# Altium PCB parsa_nami.PcbDoc (part 3 of 3)
Units mm, origin at the board's own origin, x right, y up, seen from the top; angles counter-clockwise.
Board outline 98.55 x 75.06 mm, 2 copper layers (Top Layer, Bottom Layer); 28 components, 23 nets, 118 pads, 19 vias.
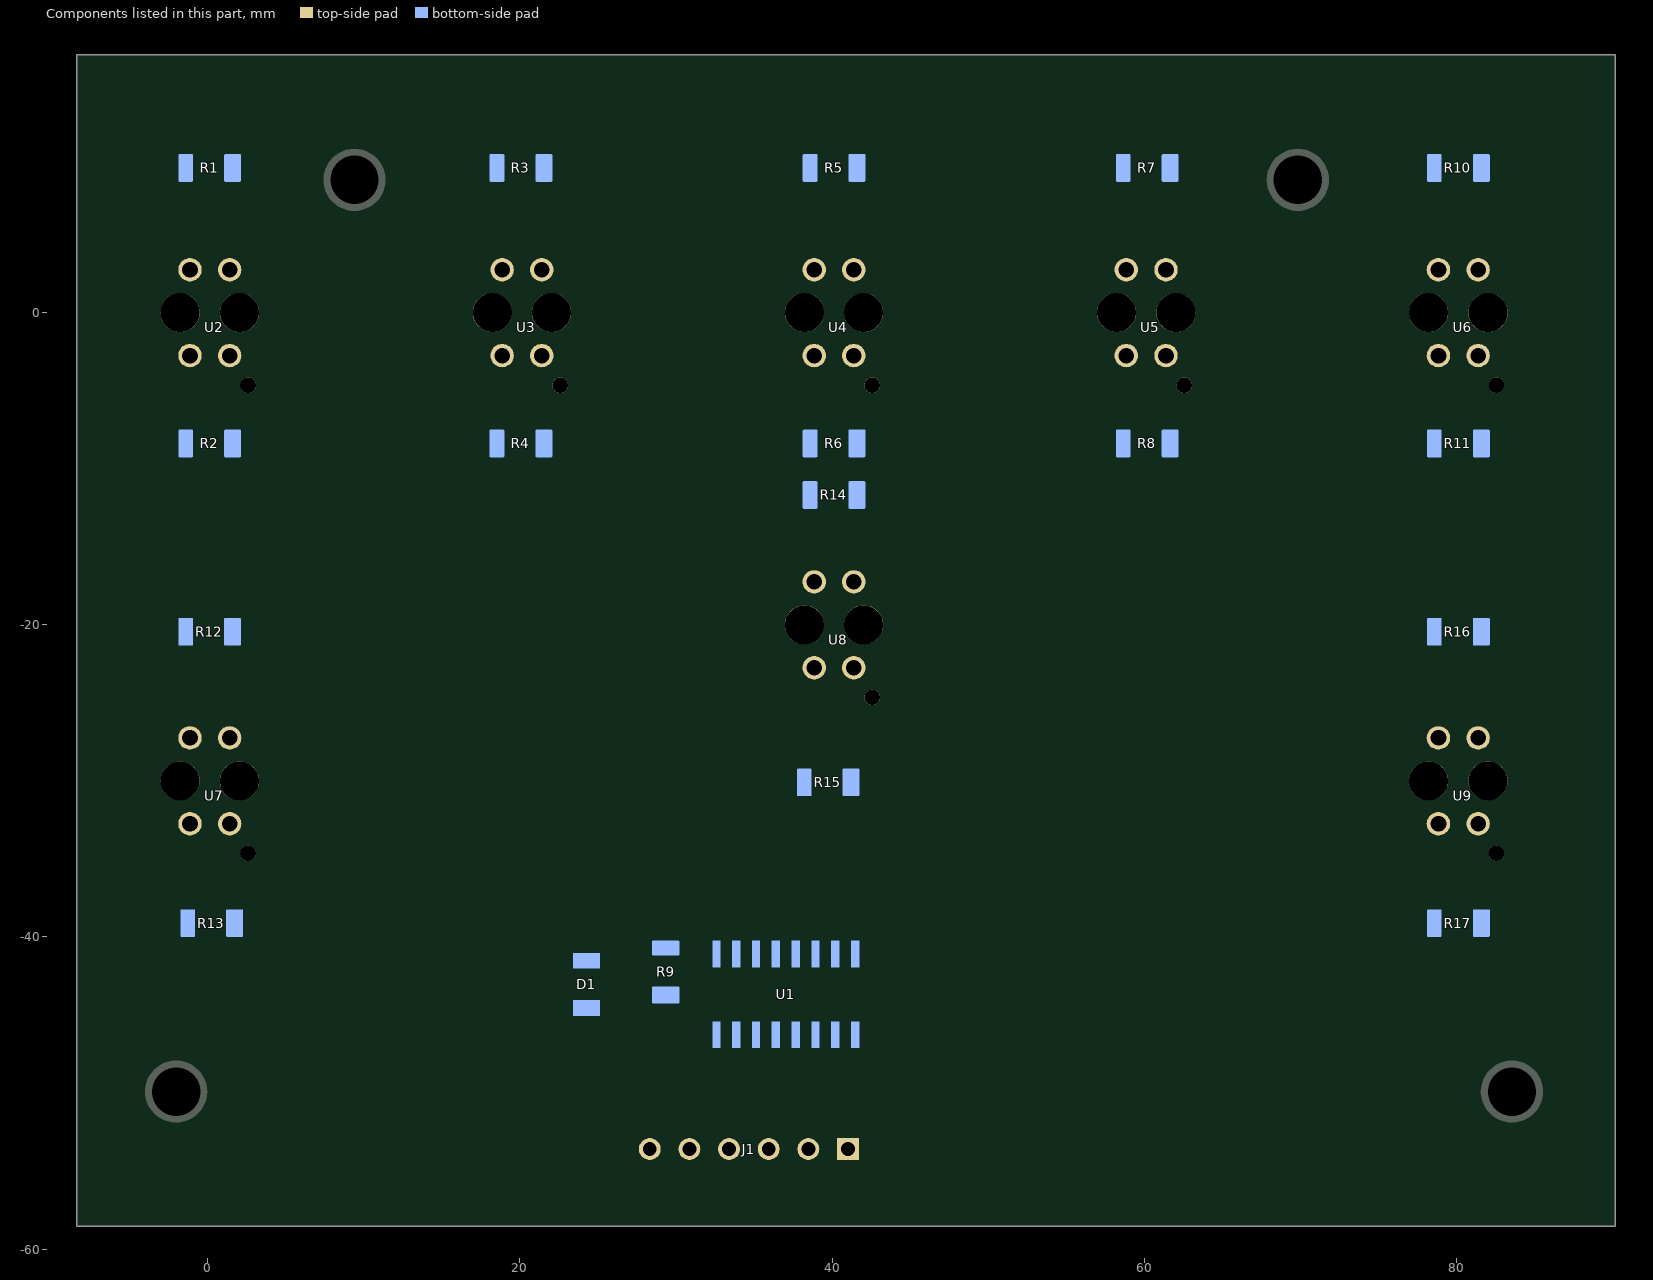
[diagram p3: the components of this part, seen from the top]

## Via types
v1: diameter 1.27, hole 0.711, Top Layer to Bottom Layer, 19 vias

## Nets (pads, with @x,y where several pads share a name; then routed paths per layer and width w, separated by ;. In a path a pad name is that pad's centre, name@x,y a point inside that pad or via, vN(x,y) a via of type N, cw(c..) or ccw(c..) an arc to the next point about the centre after c; other vN are vias at no path point) (continued)
copper on no net: (continued)
  Bottom Layer w0.013: 76.657,-43.282 77.483,-43.282 ; 76.657,-43.269 77.483,-43.269 ; 76.657,-42.761 77.368,-42.761 ; 76.657,-42.748 77.368,-42.748 ; 76.657,-42.735 77.356,-42.735 ; 76.657,-42.723 77.356,-42.723 ; 76.657,-42.71 77.356,-42.71 ; 76.67,-43.256 77.47,-43.256 ; 76.67,-43.243 77.47,-43.243 ; 76.67,-43.231 77.47,-43.231 ; 76.67,-43.218 77.47,-43.218 ; 76.67,-43.205 77.47,-43.205 ; 76.67,-43.193 77.457,-43.193 ; 76.67,-43.18 77.457,-43.18 ; 76.67,-43.167 77.457,-43.167 ; 76.67,-43.155 77.445,-43.155 ; 76.67,-43.142 77.445,-43.142 ; 76.67,-43.129 77.445,-43.129 ; 76.67,-43.116 77.445,-43.116 ; 76.67,-43.104 77.432,-43.104 ; 76.67,-43.015 77.406,-43.015 ; 76.67,-43.002 77.406,-43.002 ; 76.67,-42.989 77.406,-42.989 ; 76.67,-42.977 77.406,-42.977 ; 76.67,-42.964 77.406,-42.964 ; 76.67,-42.951 77.394,-42.951 ; 76.67,-42.939 77.394,-42.939 ; 76.67,-42.926 77.394,-42.926 ; 76.67,-42.812 77.381,-42.812 ; 76.67,-42.799 77.368,-42.799 ; 76.67,-42.786 77.368,-42.786 ; 76.67,-42.774 77.368,-42.774 ; 76.683,-47.079 77.749,-47.079 ; 76.683,-43.091 77.432,-43.091 ; 76.683,-43.078 77.419,-43.078 ; 76.683,-43.066 77.419,-43.066 ; 76.683,-43.053 77.419,-43.053 ; 76.683,-43.04 77.419,-43.04 ; 76.683,-43.028 77.419,-43.028 ; 76.683,-42.913 77.394,-42.913 ; 76.683,-42.901 77.394,-42.901 ; 76.683,-42.888 77.394,-42.888 ; 76.683,-42.875 77.381,-42.875 ; 76.683,-42.862 77.381,-42.862 ; 76.683,-42.85 77.381,-42.85 ; 76.683,-42.837 77.381,-42.837 ; 76.683,-42.824 77.381,-42.824 ; 76.683,-41.834 76.695,-41.834 ; 76.721,-47.066 77.775,-47.066 ; 76.772,-47.053 77.787,-47.053 ; 76.81,-47.041 77.8,-47.041 ; 76.835,-47.028 77.813,-47.028 ; 76.848,-43.84 77.686,-43.84 ; 76.86,-43.853 77.686,-43.853 ; 76.873,-47.015 77.838,-47.015 ; 76.873,-43.866 77.699,-43.866 ; 76.886,-43.878 77.699,-43.878 ; 76.898,-43.891 77.711,-43.891 ; 76.911,-47.003 77.851,-47.003 ; 76.911,-43.904 77.711,-43.904 ; 76.924,-43.929 77.724,-43.929 ; 76.924,-43.917 77.724,-43.917 ; 76.937,-46.99 77.864,-46.99 ; 76.937,-43.955 77.737,-43.955 ; 76.937,-43.942 77.724,-43.942 ; 76.949,-43.98 77.749,-43.98 ; 76.949,-43.967 77.737,-43.967 ; 76.962,-46.977 77.876,-46.977 ; 76.962,-44.005 77.762,-44.005 ; 76.962,-43.993 77.749,-43.993 ; 76.975,-44.031 77.775,-44.031 ; 76.975,-44.018 77.762,-44.018 ; 76.987,-44.056 77.775,-44.056 ; 76.987,-44.044 77.775,-44.044 ; 77,-46.965 77.902,-46.965 ; 77,-44.082 77.787,-44.082 ; 77,-44.069 77.787,-44.069 ; 77.013,-44.12 77.813,-44.12 ; 77.013,-44.107 77.8,-44.107 ; 77.013,-44.094 77.8,-44.094 ; 77.025,-46.952 77.915,-46.952 ; 77.025,-44.158 77.826,-44.158 ; 77.025,-44.145 77.813,-44.145 ; 77.025,-44.133 77.813,-44.133 ; 77.038,-44.183 77.838,-44.183 ; 77.038,-44.171 77.826,-44.171 ; 77.051,-46.939 77.927,-46.939 ; 77.051,-44.209 77.851,-44.209 ; 77.051,-44.196 77.838,-44.196 ; 77.064,-44.259 77.864,-44.259 ; 77.064,-44.247 77.864,-44.247 ; 77.064,-44.234 77.864,-44.234 ; 77.064,-44.221 77.851,-44.221 ; 77.076,-46.926 77.94,-46.926 ; 77.076,-44.298 77.889,-44.298 ; 77.076,-44.285 77.876,-44.285 ; 77.076,-44.272 77.876,-44.272 ; 77.089,-44.348 77.915,-44.348 ; 77.089,-44.336 77.902,-44.336 ; 77.089,-44.323 77.902,-44.323 ; 77.089,-44.31 77.889,-44.31 ; 77.102,-46.914 77.953,-46.914 ; 77.102,-44.386 77.927,-44.386 ; 77.102,-44.374 77.927,-44.374 ; 77.102,-44.361 77.915,-44.361 ; 77.114,-44.425 77.94,-44.425 ; 77.114,-44.412 77.94,-44.412 ; 77.114,-44.399 77.927,-44.399 ; 77.127,-46.901 77.965,-46.901 ; 77.127,-44.463 77.965,-44.463 ; 77.127,-44.45 77.953,-44.45 ; 77.127,-44.437 77.953,-44.437 ; 77.14,-44.501 77.978,-44.501 ; 77.14,-44.488 77.978,-44.488 ; 77.14,-44.475 77.965,-44.475 ; 77.153,-46.888 77.978,-46.888 ; 77.153,-44.552 78.003,-44.552 ; 77.153,-44.539 77.991,-44.539 ; 77.153,-44.526 77.991,-44.526 ; 77.153,-44.514 77.978,-44.514 ; 77.165,-44.602 78.029,-44.602 ; 77.165,-44.59 78.016,-44.59 ; 77.165,-44.577 78.016,-44.577 ; 77.165,-44.564 78.003,-44.564 ; 77.178,-46.876 78.003,-46.876 ; 77.178,-44.64 78.041,-44.64 ; 77.178,-44.628 78.041,-44.628 ; 77.178,-44.615 78.029,-44.615 ; 77.191,-44.691 78.067,-44.691 ; 77.191,-44.679 78.054,-44.679 ; 77.191,-44.666 78.054,-44.666 ; 77.191,-44.653 78.054,-44.653 ; 77.203,-46.863 78.016,-46.863 ; 77.203,-44.729 78.08,-44.729 ; 77.203,-44.717 78.08,-44.717 ; 77.203,-44.704 78.08,-44.704 ; 77.216,-44.767 78.092,-44.767 ; 77.216,-44.755 78.092,-44.755 ; 77.216,-44.742 78.092,-44.742 ; 77.229,-46.85 78.029,-46.85 ; 77.229,-44.793 78.105,-44.793 ; 77.229,-44.78 78.105,-44.78 ; 77.241,-46.838 78.041,-46.838 ; 77.241,-44.856 78.13,-44.856 ; 77.241,-44.844 78.13,-44.844 ; 77.241,-44.831 78.118,-44.831 ; 77.241,-44.818 78.118,-44.818 ; 77.241,-44.806 78.118,-44.806 ; 77.254,-44.895 78.156,-44.895 ; 77.254,-44.882 78.143,-44.882 ; 77.254,-44.869 78.143,-44.869 ; 77.267,-46.825 78.054,-46.825 ; 77.267,-44.92 78.168,-44.92 ; 77.267,-44.907 78.156,-44.907 ; 77.279,-44.945 78.181,-44.945 ; 77.279,-44.933 78.168,-44.933 ; 77.292,-46.812 78.067,-46.812 ; 77.292,-44.983 78.194,-44.983 ; 77.292,-44.971 78.181,-44.971 ; 77.292,-44.958 78.181,-44.958 ; 77.305,-46.799 78.08,-46.799 ; 77.305,-45.034 78.219,-45.034 ; 77.305,-45.021 78.219,-45.021 ; 77.305,-45.009 78.207,-45.009 ; 77.305,-44.996 78.207,-44.996 ; 77.318,-45.072 78.232,-45.072 ; 77.318,-45.06 78.232,-45.06 ; 77.318,-45.047 78.219,-45.047 ; 77.33,-46.787 78.092,-46.787 ; 77.33,-45.11 78.257,-45.11 ; 77.33,-45.098 78.257,-45.098 ; 77.33,-45.085 78.245,-45.085 ; 77.343,-46.774 78.105,-46.774 ; 77.343,-45.136 78.27,-45.136 ; 77.343,-45.123 78.27,-45.123 ; 77.356,-45.174 78.295,-45.174 ; 77.356,-45.161 78.283,-45.161 ; 77.356,-45.148 78.283,-45.148 ; 77.368,-46.761 78.118,-46.761 ; 77.368,-45.199 78.308,-45.199 ; 77.368,-45.187 78.308,-45.187 ; 77.381,-46.749 78.13,-46.749 ; 77.381,-45.237 78.334,-45.237 ; 77.381,-45.225 78.321,-45.225 ; 77.381,-45.212 78.321,-45.212 ; 77.394,-45.25 78.334,-45.25 ; 77.406,-46.736 78.143,-46.736 ; 77.406,-45.276 78.359,-45.276 ; 77.406,-45.263 78.346,-45.263 ; 77.419,-46.723 78.156,-46.723 ; 77.419,-45.301 78.372,-45.301 ; 77.419,-45.288 78.359,-45.288 ; 77.432,-45.339 78.397,-45.339 ; 77.432,-45.326 78.384,-45.326 ; 77.432,-45.314 78.384,-45.314 ; 77.445,-46.711 78.168,-46.711 ; 77.445,-45.364 78.41,-45.364 ; 77.445,-45.352 78.397,-45.352 ; 77.457,-46.698 78.181,-46.698 ; 77.457,-45.39 78.422,-45.39 ; 77.457,-45.377 78.422,-45.377 ; 77.457,-42.139 77.483,-42.139 ; 77.47,-46.685 78.181,-46.685 ; 77.47,-45.402 78.435,-45.402 ; 77.47,-42.177 77.546,-42.177 ; 77.47,-42.164 77.521,-42.164 ; 77.47,-42.151 77.495,-42.151 ; 77.483,-45.428 78.448,-45.428 ; 77.483,-45.415 78.435,-45.415 ; 77.483,-42.215 77.61,-42.215 ; 77.483,-42.202 77.584,-42.202 ; 77.483,-42.189 77.559,-42.189 ; 77.495,-46.672 78.194,-46.672 ; 77.495,-45.453 78.473,-45.453 ; 77.495,-45.441 78.461,-45.441 ; 77.495,-42.266 77.686,-42.266 ; 77.495,-42.253 77.66,-42.253 ; 77.495,-42.24 77.648,-42.24 ; 77.495,-42.227 77.622,-42.227 ; 77.508,-46.66 78.207,-46.66 ; 77.508,-45.479 78.486,-45.479 ; 77.508,-45.466 78.473,-45.466 ; 77.508,-42.329 77.775,-42.329 ; 77.508,-42.316 77.749,-42.316 ; 77.508,-42.304 77.737,-42.304 ; 77.508,-42.291 77.711,-42.291 ; 77.508,-42.278 77.699,-42.278 ; 77.521,-46.647 78.219,-46.647 ; 77.521,-45.504 78.499,-45.504 ; 77.521,-45.491 78.499,-45.491 ; 77.521,-42.405 77.864,-42.405 ; 77.521,-42.393 77.851,-42.393 ; 77.521,-42.38 77.838,-42.38 ; 77.521,-42.367 77.813,-42.367 ; 77.521,-42.355 77.8,-42.355 ; 77.521,-42.342 77.787,-42.342 ; 77.534,-45.529 78.524,-45.529 ; 77.534,-45.517 78.511,-45.517 ; 77.534,-42.456 77.927,-42.456 ; 77.534,-42.443 77.915,-42.443 ; 77.534,-42.431 77.902,-42.431 ; 77.534,-42.418 77.876,-42.418 ; 77.546,-46.634 78.232,-46.634 ; 77.546,-45.555 78.537,-45.555 ; 77.546,-45.542 78.537,-45.542 ; 77.546,-42.52 77.851,-42.52 ; 77.546,-42.507 77.851,-42.507 ; 77.546,-42.494 77.851,-42.494 ; 77.546,-42.481 77.864,-42.481 ; 77.546,-42.469 77.94,-42.469 ; 77.559,-46.622 78.232,-46.622 ; 77.559,-45.568 78.549,-45.568 ; 77.559,-42.583 77.775,-42.583 ; 77.559,-42.57 77.787,-42.57 ; 77.559,-42.558 77.8,-42.558 ; 77.559,-42.545 77.813,-42.545 ; 77.559,-42.532 78.016,-42.532 ; 77.572,-46.609 78.219,-46.609 ; 77.572,-45.593 78.562,-45.593 ; 77.572,-45.58 78.562,-45.58 ; 77.572,-42.647 77.724,-42.647 ; 77.572,-42.634 77.737,-42.634 ; 77.572,-42.621 77.749,-42.621 ; 77.572,-42.608 77.749,-42.608 ; 77.572,-42.596 77.762,-42.596 ; 77.584,-46.596 78.207,-46.596 ; 77.584,-45.618 78.588,-45.618 ; 77.584,-45.606 78.575,-45.606 ; 77.584,-42.71 77.699,-42.71 ; 77.584,-42.697 77.686,-42.697 ; 77.584,-42.685 77.699,-42.685 ; 77.584,-42.672 77.699,-42.672 ; 77.584,-42.659 77.711,-42.659 ; 77.597,-46.584 78.194,-46.584 ; 77.597,-45.644 78.613,-45.644 ; 77.597,-45.631 78.6,-45.631 ; 77.597,-42.786 77.915,-42.786 ; 77.597,-42.774 77.787,-42.774 ; 77.597,-42.761 77.775,-42.761 ; 77.597,-42.748 77.775,-42.748 ; 77.597,-42.735 77.775,-42.735 ; 77.597,-42.723 77.787,-42.723 ; 77.61,-45.657 78.613,-45.657 ; 77.61,-42.812 77.889,-42.812 ; 77.61,-42.799 77.902,-42.799 ; 77.622,-46.571 78.181,-46.571 ; 77.622,-45.669 78.626,-45.669 ; 77.622,-42.824 77.876,-42.824 ; 77.635,-46.558 78.156,-46.558 ; 77.635,-45.695 78.638,-45.695 ; 77.635,-45.682 78.638,-45.682 ; 77.635,-42.837 77.864,-42.837 ; 77.648,-46.545 78.143,-46.545 ; 77.648,-45.707 78.651,-45.707 ; 77.648,-42.85 77.864,-42.85 ; 77.66,-46.533 78.13,-46.533 ; 77.66,-45.72 78.664,-45.72 ; 77.66,-42.862 77.876,-42.862 ; 77.673,-46.52 78.13,-46.52 ; 77.673,-45.745 78.676,-45.745 ; 77.673,-45.733 78.676,-45.733 ; 77.673,-42.875 78.003,-42.875 ; 77.686,-46.507 78.118,-46.507 ; 77.686,-45.758 78.689,-45.758 ; 77.686,-42.888 77.991,-42.888 ; 77.699,-46.495 78.105,-46.495 ; 77.699,-45.783 78.715,-45.783 ; 77.699,-45.771 78.702,-45.771 ; 77.699,-42.901 77.978,-42.901 ; 77.711,-46.482 78.105,-46.482 ; 77.711,-45.796 78.715,-45.796 ; 77.711,-42.913 77.965,-42.913 ; 77.724,-46.469 78.092,-46.469 ; 77.724,-45.822 78.74,-45.822 ; 77.724,-45.809 78.727,-45.809 ; 77.724,-42.926 77.953,-42.926 ; 77.724,-42.71 77.8,-42.71 ; 77.724,-42.697 77.826,-42.697 ; 77.737,-46.457 78.08,-46.457 ; 77.737,-45.834 78.753,-45.834 ; 77.737,-42.939 77.953,-42.939 ; 77.749,-46.444 78.067,-46.444 ; 77.749,-45.847 78.753,-45.847 ; 77.749,-42.951 77.953,-42.951 ; 77.749,-42.685 77.826,-42.685 ; 77.749,-42.672 77.851,-42.672 ; 77.762,-46.431 78.054,-46.431 ; 77.762,-45.872 78.778,-45.872 ; 77.762,-45.86 78.765,-45.86 ; 77.762,-42.964 78.054,-42.964 ; 77.762,-42.659 77.864,-42.659 ; 77.775,-46.419 78.041,-46.419 ; 77.775,-45.885 78.791,-45.885 ; 77.775,-42.977 78.041,-42.977 ; 77.775,-42.647 77.876,-42.647 ; 77.787,-46.406 78.029,-46.406 ; 77.787,-45.898 78.803,-45.898 ; 77.787,-42.989 78.029,-42.989 ; 77.787,-42.634 77.889,-42.634 ; 77.8,-46.393 78.029,-46.393 ; 77.8,-45.923 78.816,-45.923 ; 77.8,-45.91 78.803,-45.91 ; 77.8,-43.002 78.003,-43.002 ; 77.8,-42.774 77.927,-42.774 ; 77.8,-42.621 78.105,-42.621 ; 77.813,-46.38 78.016,-46.38 ; 77.813,-45.936 78.829,-45.936 ; 77.813,-43.015 78.003,-43.015 ; 77.813,-42.761 77.94,-42.761 ; 77.813,-42.608 78.092,-42.608 ; 77.813,-42.596 78.08,-42.596 ; 77.826,-46.368 78.003,-46.368 ; 77.826,-45.961 78.842,-45.961 ; 77.826,-45.949 78.829,-45.949 ; 77.826,-43.028 78.003,-43.028 ; 77.826,-42.748 77.953,-42.748 ; 77.826,-42.583 78.067,-42.583 ; 77.838,-46.355 78.003,-46.355 ; 77.838,-45.974 78.854,-45.974 ; 77.838,-43.04 78.029,-43.04 ; 77.838,-42.735 77.965,-42.735 ; 77.838,-42.57 78.054,-42.57 ; 77.838,-42.558 78.041,-42.558 ; 77.838,-42.545 78.029,-42.545 ; 77.851,-46.342 77.991,-46.342 ; 77.851,-45.987 78.867,-45.987 ; 77.851,-43.053 78.029,-43.053 ; 77.851,-42.723 77.965,-42.723 ; 77.864,-46.33 77.978,-46.33 ; 77.864,-45.999 78.867,-45.999 ; 77.864,-43.066 78.041,-43.066 ; 77.864,-42.71 77.965,-42.71 ; 77.876,-46.317 77.965,-46.317 ; 77.876,-46.304 77.953,-46.304 ; 77.876,-46.025 78.892,-46.025 ; 77.876,-46.012 78.88,-46.012 ; 77.876,-43.091 78.041,-43.091 ; 77.876,-43.078 78.041,-43.078 ; 77.876,-42.697 77.965,-42.697 ; 77.876,-42.481 77.953,-42.481 ; 77.889,-46.291 77.94,-46.291 ; 77.889,-46.038 78.905,-46.038 ; 77.889,-43.104 78.054,-43.104 ; 77.889,-42.862 78.016,-42.862 ; 77.889,-42.685 77.953,-42.685 ; 77.889,-42.52 78.003,-42.52 ; 77.889,-42.507 77.978,-42.507 ; 77.889,-42.494 77.965,-42.494 ; 77.902,-46.279 77.927,-46.279 ; 77.902,-46.05 78.918,-46.05 ; 77.902,-43.116 78.067,-43.116 ; 77.902,-42.85 78.041,-42.85 ; 77.902,-42.672 77.94,-42.672 ; 77.915,-46.063 78.93,-46.063 ; 77.915,-43.129 78.092,-43.129 ; 77.915,-42.837 78.041,-42.837 ; 77.927,-46.076 78.943,-46.076 ; 77.927,-43.142 78.194,-43.142 ; 77.927,-42.824 78.054,-42.824 ; 77.94,-46.088 78.956,-46.088 ; 77.94,-43.167 78.156,-43.167 ; 77.94,-43.155 78.181,-43.155 ; 77.94,-42.812 78.054,-42.812 ; 77.953,-46.101 78.969,-46.101 ; 77.953,-43.18 78.13,-43.18 ; 77.953,-42.799 78.054,-42.799 ; 77.953,-42.634 78.118,-42.634 ; 77.965,-43.193 78.13,-43.193 ; 77.965,-42.786 78.041,-42.786 ; 77.965,-42.647 78.13,-42.647 ; 77.978,-46.114 78.981,-46.114 ; 77.978,-43.218 78.143,-43.218 ; 77.978,-43.205 78.143,-43.205 ; 77.978,-42.774 78.029,-42.774 ; 77.978,-42.672 78.156,-42.672 ; 77.978,-42.659 78.143,-42.659 ; 77.991,-46.126 78.994,-46.126 ; 77.991,-43.231 78.372,-43.231 ; 77.991,-42.951 78.08,-42.951 ; 77.991,-42.71 78.181,-42.71 ; 77.991,-42.697 78.181,-42.697 ; 77.991,-42.685 78.168,-42.685 ; 78.003,-46.152 79.019,-46.152 ; 78.003,-46.139 79.007,-46.139 ; 78.003,-43.243 78.384,-43.243 ; 78.003,-42.939 78.092,-42.939 ; 78.003,-42.761 78.016,-42.761 ; 78.016,-46.164 79.032,-46.164 ; 78.016,-43.269 78.346,-43.269 ; 78.016,-43.256 78.359,-43.256 ; 78.016,-42.926 78.105,-42.926 ; 78.029,-46.177 79.045,-46.177 ; 78.029,-43.282 78.321,-43.282 ; 78.029,-42.913 78.13,-42.913 ; 78.029,-42.723 78.194,-42.723 ; 78.041,-46.19 79.057,-46.19 ; 78.041,-43.307 78.27,-43.307 ; 78.041,-43.294 78.295,-43.294 ; 78.041,-42.901 78.346,-42.901 ; 78.054,-46.203 79.07,-46.203 ; 78.054,-43.32 78.257,-43.32 ; 78.054,-42.888 78.334,-42.888 ; 78.054,-42.735 78.207,-42.735 ; 78.067,-46.215 79.096,-46.215 ; 78.067,-43.345 78.232,-43.345 ; 78.067,-43.332 78.245,-43.332 ; 78.067,-43.04 78.118,-43.04 ; 78.067,-43.028 78.118,-43.028 ; 78.067,-42.875 78.321,-42.875 ; 78.067,-42.761 78.232,-42.761 ; 78.067,-42.748 78.219,-42.748 ; 78.08,-46.228 79.108,-46.228 ; 78.08,-43.358 78.232,-43.358 ; 78.08,-43.066 78.13,-43.066 ; 78.08,-43.053 78.13,-43.053 ; 78.08,-43.015 78.105,-43.015 ; 78.08,-43.002 78.092,-43.002 ; 78.08,-42.862 78.321,-42.862 ; 78.08,-42.786 78.257,-42.786 ; 78.08,-42.774 78.245,-42.774 ; 78.092,-46.241 79.121,-46.241 ; 78.092,-43.383 78.651,-43.383 ; 78.092,-43.37 78.638,-43.37 ; 78.092,-42.85 78.308,-42.85 ; 78.105,-46.266 79.159,-46.266 ; 78.105,-46.253 79.134,-46.253 ; 78.105,-43.396 78.651,-43.396 ; 78.105,-43.129 78.219,-43.129 ; 78.105,-43.078 78.118,-43.078 ; 78.105,-42.837 78.295,-42.837 ; 78.105,-42.799 78.27,-42.799 ; 78.118,-46.279 79.184,-46.279 ; 78.118,-43.421 78.664,-43.421 ; 78.118,-43.409 78.664,-43.409 ; 78.118,-42.964 78.181,-42.964 ; 78.118,-42.824 78.283,-42.824 ; 78.118,-42.812 78.27,-42.812 ; 78.13,-46.291 79.197,-46.291 ; 78.13,-43.447 78.676,-43.447 ; 78.13,-43.434 78.676,-43.434 ; 78.13,-42.977 78.194,-42.977 ; 78.143,-46.304 79.235,-46.304 ; 78.143,-43.459 78.448,-43.459 ; 78.143,-43.116 78.245,-43.116 ; 78.143,-43.002 78.207,-43.002 ; 78.143,-42.989 78.194,-42.989 ; 78.143,-42.951 78.168,-42.951 ; 78.156,-46.317 79.273,-46.317 ; 78.156,-43.485 78.384,-43.485 ; 78.156,-43.472 78.41,-43.472 ; 78.156,-43.104 78.27,-43.104 ; 78.156,-43.028 78.435,-43.028 ; 78.156,-43.015 78.207,-43.015 ; 78.168,-46.33 79.311,-46.33 ; 78.168,-43.51 78.334,-43.51 ; 78.168,-43.497 78.359,-43.497 ; 78.168,-43.091 78.283,-43.091 ; 78.168,-43.078 78.295,-43.078 ; 78.168,-43.066 78.321,-43.066 ; 78.168,-43.053 78.346,-43.053 ; 78.168,-43.04 78.448,-43.04 ; 78.181,-46.342 79.35,-46.342 ; 78.181,-43.536 78.321,-43.536 ; 78.181,-43.523 78.321,-43.523 ; 78.181,-42.913 78.359,-42.913 ; 78.194,-46.355 79.375,-46.355 ; 78.194,-43.561 78.346,-43.561 ; 78.194,-43.548 78.346,-43.548 ; 78.194,-42.926 78.372,-42.926 ; 78.207,-46.368 79.413,-46.368 ; 78.207,-43.586 78.346,-43.586 ; 78.207,-43.574 78.346,-43.574 ; 78.207,-42.939 78.372,-42.939 ; 78.219,-46.38 79.451,-46.38 ; 78.219,-43.612 78.346,-43.612 ; 78.219,-43.599 78.346,-43.599 ; 78.219,-43.18 78.537,-43.18 ; 78.219,-42.964 78.397,-42.964 ; 78.219,-42.951 78.384,-42.951 ; 78.232,-46.406 79.527,-46.406 ; 78.232,-46.393 79.477,-46.393 ; 78.232,-43.637 78.372,-43.637 ; 78.232,-43.624 78.359,-43.624 ; 78.232,-43.167 78.524,-43.167 ; 78.232,-43.015 78.435,-43.015 ; 78.232,-42.989 78.41,-42.989 ; 78.232,-42.977 78.397,-42.977 ; 78.245,-46.419 79.578,-46.419 ; 78.245,-43.663 78.562,-43.663 ; 78.245,-43.65 78.384,-43.65 ; 78.245,-43.002 78.422,-43.002 ; 78.257,-46.431 79.616,-46.431 ; 78.257,-43.688 78.435,-43.688 ; 78.257,-43.675 78.562,-43.675 ; 78.257,-43.155 78.524,-43.155 ; 78.27,-46.444 79.667,-46.444 ; 78.27,-43.726 78.41,-43.726 ; 78.27,-43.713 78.41,-43.713 ; 78.27,-43.701 78.422,-43.701 ; 78.27,-43.358 78.638,-43.358 ; 78.27,-43.142 78.511,-43.142 ; 78.283,-46.457 79.756,-46.457 ; 78.283,-43.752 78.41,-43.752 ; 78.283,-43.739 78.41,-43.739 ; 78.295,-46.482 80.099,-46.482 ; 78.295,-46.469 79.997,-46.469 ; 78.295,-43.777 78.41,-43.777 ; 78.295,-43.764 78.41,-43.764 ; 78.295,-43.345 78.626,-43.345 ; 78.295,-43.129 78.499,-43.129 ; 78.308,-46.495 80.112,-46.495 ; 78.308,-43.815 78.422,-43.815 ; 78.308,-43.802 78.422,-43.802 ; 78.308,-43.79 78.422,-43.79 ; 78.308,-43.332 78.626,-43.332 ; 78.321,-46.507 80.124,-46.507 ; 78.321,-43.853 78.626,-43.853 ; 78.321,-43.84 78.626,-43.84 ; 78.321,-43.828 78.435,-43.828 ; 78.321,-43.116 78.499,-43.116 ; 78.334,-46.52 80.124,-46.52 ; 78.334,-43.878 78.626,-43.878 ; 78.334,-43.866 78.626,-43.866 ; 78.334,-43.32 78.613,-43.32 ; 78.334,-43.104 78.486,-43.104 ; 78.346,-46.533 80.124,-46.533 ; 78.346,-43.917 78.588,-43.917 ; 78.346,-43.904 78.6,-43.904 ; 78.346,-43.891 78.626,-43.891 ; 78.346,-43.091 78.486,-43.091 ; 78.359,-46.545 80.137,-46.545 ; 78.359,-43.967 78.473,-43.967 ; 78.359,-43.955 78.473,-43.955 ; 78.359,-43.942 78.486,-43.942 ; 78.359,-43.929 78.537,-43.929 ; 78.359,-43.307 78.613,-43.307 ; 78.372,-46.558 80.137,-46.558 ; 78.372,-44.005 78.867,-44.005 ; 78.372,-43.993 78.867,-43.993 ; 78.372,-43.98 78.867,-43.98 ; 78.372,-43.294 78.6,-43.294 ; 78.372,-43.078 78.473,-43.078 ; 78.372,-43.053 78.461,-43.053 ; 78.384,-46.571 80.137,-46.571 ; 78.384,-44.044 78.486,-44.044 ; 78.384,-44.031 78.511,-44.031 ; 78.384,-44.018 78.588,-44.018 ; 78.384,-43.574 78.435,-43.574 ; 78.384,-43.561 78.435,-43.561 ; 78.384,-43.548 78.422,-43.548 ; 78.384,-43.066 78.461,-43.066 ; 78.397,-46.584 80.137,-46.584 ; 78.397,-44.094 78.499,-44.094 ; 78.397,-44.082 78.511,-44.082 ; 78.397,-44.069 78.511,-44.069 ; 78.397,-44.056 78.486,-44.056 ; 78.397,-43.599 78.435,-43.599 ; 78.397,-43.586 78.435,-43.586 ; 78.397,-43.536 78.435,-43.536 ; 78.397,-43.282 78.588,-43.282 ; 78.41,-46.596 80.137,-46.596 ; 78.41,-44.158 78.499,-44.158 ; 78.41,-44.145 78.499,-44.145 ; 78.41,-44.133 78.499,-44.133 ; 78.41,-44.12 78.499,-44.12 ; 78.41,-44.107 78.499,-44.107 ; 78.41,-43.612 78.422,-43.612 ; 78.41,-43.269 78.588,-43.269 ; 78.422,-46.609 80.124,-46.609 ; 78.422,-44.209 78.918,-44.209 ; 78.422,-44.196 78.549,-44.196 ; 78.422,-44.183 78.524,-44.183 ; 78.422,-44.171 78.511,-44.171 ; 78.435,-46.634 80.112,-46.634 ; 78.435,-46.622 80.124,-46.622 ; 78.435,-45.161 78.918,-45.161 ; 78.435,-45.148 78.918,-45.148 ; 78.435,-45.136 78.918,-45.136 ; 78.435,-45.123 78.918,-45.123 ; 78.435,-45.11 78.918,-45.11 ; 78.435,-44.285 78.638,-44.285 ; 78.435,-44.272 78.638,-44.272 ; 78.435,-44.259 78.651,-44.259 ; 78.435,-44.247 78.651,-44.247 ; 78.435,-44.234 78.664,-44.234 ; 78.435,-44.221 78.715,-44.221 ; 78.435,-43.752 78.499,-43.752 ; 78.435,-43.739 78.499,-43.739 ; 78.435,-43.256 78.575,-43.256 ; 78.435,-43.193 78.549,-43.193 ; 78.448,-46.647 80.099,-46.647 ; 78.448,-45.187 78.918,-45.187 ; 78.448,-45.174 78.918,-45.174 ; 78.448,-45.098 78.93,-45.098 ; 78.448,-45.085 78.93,-45.085 ; 78.448,-45.072 78.93,-45.072 ; 78.448,-45.06 78.93,-45.06 ; 78.448,-45.047 78.93,-45.047 ; 78.448,-45.034 78.93,-45.034 ; 78.448,-44.361 78.626,-44.361 ; 78.448,-44.348 78.626,-44.348 ; 78.448,-44.336 78.626,-44.336 ; 78.448,-44.323 78.626,-44.323 ; 78.448,-44.31 78.626,-44.31 ; 78.448,-44.298 78.626,-44.298 ; 78.448,-43.79 78.537,-43.79 ; 78.448,-43.777 78.524,-43.777 ; 78.448,-43.764 78.511,-43.764 ; 78.448,-43.726 78.486,-43.726 ; 78.448,-43.65 78.562,-43.65 ; 78.448,-43.51 78.511,-43.51 ; 78.461,-46.66 80.099,-46.66 ; 78.461,-45.199 78.905,-45.199 ; 78.461,-45.021 78.93,-45.021 ; 78.461,-45.009 78.93,-45.009 ; 78.461,-44.996 78.943,-44.996 ; 78.461,-44.983 78.943,-44.983 ; 78.461,-44.971 78.943,-44.971 ; 78.461,-44.958 78.943,-44.958 ; 78.461,-44.945 78.943,-44.945 ; 78.461,-44.933 78.943,-44.933 ; 78.461,-44.92 78.943,-44.92 ; 78.461,-44.475 78.943,-44.475 ; 78.461,-44.463 78.943,-44.463 ; 78.461,-44.45 78.943,-44.45 ; 78.461,-44.437 78.943,-44.437 ; 78.461,-44.425 78.943,-44.425 ; 78.461,-44.412 78.524,-44.412 ; 78.461,-44.399 78.524,-44.399 ; 78.461,-44.386 78.524,-44.386 ; 78.461,-44.374 78.549,-44.374 ; 78.461,-43.802 78.816,-43.802 ; 78.461,-43.637 78.753,-43.637 ; 78.461,-43.536 78.524,-43.536 ; 78.461,-43.523 78.511,-43.523 ; 78.461,-43.497 78.499,-43.497 ; 78.461,-43.243 78.575,-43.243 ; 78.461,-43.205 78.549,-43.205 ; 78.473,-46.672 80.073,-46.672 ; 78.473,-45.212 78.905,-45.212 ; 78.473,-44.907 78.943,-44.907 ; 78.473,-44.895 78.943,-44.895 ; 78.473,-44.882 78.943,-44.882 ; 78.473,-44.869 78.943,-44.869 ; 78.473,-44.856 78.943,-44.856 ; 78.473,-44.844 78.943,-44.844 ; 78.473,-44.831 78.943,-44.831 ; 78.473,-44.818 78.956,-44.818 ; 78.473,-44.806 78.956,-44.806 ; 78.473,-44.793 78.956,-44.793 ; 78.473,-44.78 78.956,-44.78 ; 78.473,-44.767 78.956,-44.767 ; 78.473,-44.755 78.956,-44.755 ; 78.473,-44.742 78.956,-44.742 ; 78.473,-44.729 78.956,-44.729 ; 78.473,-44.717 78.956,-44.717 ; 78.473,-44.704 78.956,-44.704 ; 78.473,-44.691 78.956,-44.691 ; 78.473,-44.679 78.956,-44.679 ; 78.473,-44.666 78.956,-44.666 ; 78.473,-44.653 78.956,-44.653 ; 78.473,-44.64 78.956,-44.64 ; 78.473,-44.628 78.956,-44.628 ; 78.473,-44.615 78.956,-44.615 ; 78.473,-44.602 78.956,-44.602 ; 78.473,-44.59 78.956,-44.59 ; 78.473,-44.577 78.956,-44.577 ; 78.473,-44.564 78.943,-44.564 ; 78.473,-44.552 78.943,-44.552 ; 78.473,-44.539 78.943,-44.539 ; 78.473,-44.526 78.943,-44.526 ; 78.473,-44.514 78.943,-44.514 ; 78.473,-44.501 78.943,-44.501 ; 78.473,-44.488 78.943,-44.488 ; 78.473,-43.828 78.626,-43.828 ; 78.473,-43.815 78.638,-43.815 ; 78.473,-43.624 78.753,-43.624 ; 78.473,-43.612 78.753,-43.612 ; 78.473,-43.599 78.74,-43.599 ; 78.473,-43.586 78.74,-43.586 ; 78.473,-43.574 78.524,-43.574 ; 78.473,-43.561 78.524,-43.561 ; 78.473,-43.548 78.524,-43.548 ; 78.473,-43.231 78.562,-43.231 ; 78.473,-43.218 78.562,-43.218 ; 78.486,-45.237 78.905,-45.237 ; 78.486,-45.225 78.905,-45.225 ; 78.499,-46.685 80.048,-46.685 ; 78.499,-45.25 78.905,-45.25 ; 78.499,-43.688 78.575,-43.688 ; 78.511,-46.698 80.023,-46.698 ; 78.511,-45.263 78.905,-45.263 ; 78.511,-43.701 78.588,-43.701 ; 78.511,-43.459 78.689,-43.459 ; 78.524,-46.711 79.997,-46.711 ; 78.524,-43.713 78.588,-43.713 ; 78.524,-43.472 78.689,-43.472 ; 78.537,-46.723 79.959,-46.723 ; 78.537,-45.276 78.892,-45.276 ; 78.537,-44.133 78.588,-44.133 ; 78.537,-44.12 78.588,-44.12 ; 78.537,-44.107 78.588,-44.107 ; 78.537,-44.094 78.588,-44.094 ; 78.537,-44.082 78.588,-44.082 ; 78.537,-43.726 78.588,-43.726 ; 78.537,-43.497 78.702,-43.497 ; 78.537,-43.485 78.689,-43.485 ; 78.549,-46.736 79.921,-46.736 ; 78.549,-45.288 78.892,-45.288 ; 78.549,-44.145 78.588,-44.145 ; 78.549,-43.967 78.867,-43.967 ; 78.549,-43.752 78.588,-43.752 ; 78.549,-43.739 78.588,-43.739 ; 78.549,-43.574 78.727,-43.574 ; 78.549,-43.548 78.727,-43.548 ; 78.549,-43.536 78.715,-43.536 ; 78.549,-43.523 78.715,-43.523 ; 78.549,-43.51 78.702,-43.51 ; 78.562,-45.301 78.892,-45.301 ; 78.562,-44.374 78.575,-44.374 ; 78.562,-44.196 78.905,-44.196 ; 78.562,-44.069 78.588,-44.069 ; 78.562,-43.561 78.727,-43.561 ; 78.575,-46.749 79.87,-46.749 ; 78.588,-46.761 79.845,-46.761 ; 78.588,-45.314 78.892,-45.314 ; 78.588,-43.65 78.765,-43.65 ; 78.6,-46.774 79.794,-46.774 ; 78.6,-45.326 78.892,-45.326 ; 78.6,-44.412 78.613,-44.412 ; 78.6,-44.183 78.905,-44.183 ; 78.6,-43.955 78.854,-43.955 ; 78.6,-43.79 78.816,-43.79 ; 78.6,-43.663 78.765,-43.663 ; 78.613,-46.787 79.756,-46.787 ; 78.613,-45.339 78.88,-45.339 ; 78.613,-44.171 78.905,-44.171 ; 78.613,-44.158 78.905,-44.158 ; 78.613,-43.777 78.803,-43.777 ; 78.613,-43.701 78.778,-43.701 ; 78.613,-43.688 78.778,-43.688 ; 78.613,-43.675 78.778,-43.675 ; 78.626,-46.799 79.731,-46.799 ; 78.626,-45.352 78.88,-45.352 ; 78.626,-44.412 78.638,-44.412 ; 78.626,-44.145 78.676,-44.145 ; 78.626,-44.133 78.676,-44.133 ; 78.626,-44.12 78.676,-44.12 ; 78.626,-44.107 78.676,-44.107 ; 78.626,-44.094 78.676,-44.094 ; 78.626,-44.082 78.676,-44.082 ; 78.626,-44.069 78.676,-44.069 ; 78.626,-44.056 78.664,-44.056 ; 78.626,-43.764 78.803,-43.764 ; 78.626,-43.752 78.803,-43.752 ; 78.626,-43.739 78.791,-43.739 ; 78.626,-43.726 78.791,-43.726 ; 78.626,-43.713 78.791,-43.713 ; 78.638,-46.812 79.692,-46.812 ; 78.638,-45.364 78.88,-45.364 ; 78.651,-46.825 79.629,-46.825 ; 78.651,-45.377 78.88,-45.377 ; 78.651,-44.412 78.943,-44.412 ; 78.651,-43.942 78.854,-43.942 ; 78.651,-43.891 78.842,-43.891 ; 78.651,-43.815 78.816,-43.815 ; 78.664,-45.39 78.867,-45.39 ; 78.664,-44.323 78.765,-44.323 ; 78.664,-43.878 78.842,-43.878 ; 78.664,-43.866 78.829,-43.866 ; 78.664,-43.853 78.829,-43.853 ; 78.664,-43.84 78.829,-43.84 ; 78.664,-43.828 78.829,-43.828 ; 78.676,-46.838 79.604,-46.838 ; 78.676,-45.402 78.867,-45.402 ; 78.676,-44.348 78.765,-44.348 ; 78.676,-44.336 78.765,-44.336 ; 78.676,-44.31 78.753,-44.31 ; 78.676,-44.298 78.753,-44.298 ; 78.676,-44.285 78.74,-44.285 ; 78.676,-44.018 78.88,-44.018 ; 78.676,-43.929 78.854,-43.929 ; 78.676,-43.917 78.854,-43.917 ; 78.676,-43.904 78.842,-43.904 ; 78.689,-46.85 79.578,-46.85 ; 78.689,-45.415 78.867,-45.415 ; 78.689,-44.272 78.727,-44.272 ; 78.689,-44.031 78.88,-44.031 ; 78.702,-46.863 79.54,-46.863 ; 78.702,-45.428 78.867,-45.428 ; 78.702,-44.145 78.905,-44.145 ; 78.702,-44.056 78.88,-44.056 ; 78.702,-44.044 78.88,-44.044 ; 78.715,-46.876 79.515,-46.876 ; 78.715,-45.441 78.854,-45.441 ; 78.715,-44.133 78.905,-44.133 ; 78.715,-44.12 78.892,-44.12 ; 78.715,-44.107 78.892,-44.107 ; 78.715,-44.094 78.892,-44.094 ; 78.715,-44.082 78.892,-44.082 ; 78.715,-44.069 78.892,-44.069 ; 78.727,-46.901 79.426,-46.901 ; 78.727,-46.888 79.464,-46.888 ; 78.727,-45.453 78.854,-45.453 ; 78.727,-44.221 78.918,-44.221 ; 78.74,-46.914 79.4,-46.914 ; 78.753,-46.926 79.362,-46.926 ; 78.753,-45.466 78.854,-45.466 ; 78.765,-46.939 79.337,-46.939 ; 78.765,-45.479 78.854,-45.479 ; 78.765,-44.234 78.918,-44.234 ; 78.778,-46.952 79.286,-46.952 ; 78.778,-45.491 78.842,-45.491 ; 78.778,-44.399 78.791,-44.399 ; 78.778,-44.247 78.918,-44.247 ; 78.791,-46.965 79.248,-46.965 ; 78.791,-44.285 78.918,-44.285 ; 78.791,-44.272 78.918,-44.272 ; 78.791,-44.259 78.918,-44.259 ; 78.803,-46.977 79.21,-46.977 ; 78.803,-45.504 78.842,-45.504 ; 78.803,-44.399 78.943,-44.399 ; 78.803,-44.386 78.93,-44.386 ; 78.803,-44.374 78.93,-44.374 ; 78.803,-44.361 78.93,-44.361 ; 78.803,-44.348 78.93,-44.348 ; 78.803,-44.336 78.93,-44.336 ; 78.803,-44.323 78.93,-44.323 ; 78.803,-44.31 78.93,-44.31 ; 78.803,-44.298 78.93,-44.298 ; 78.816,-46.99 79.172,-46.99 ; 78.816,-45.517 78.842,-45.517 ; 78.829,-47.003 79.121,-47.003 ; 78.842,-47.015 79.096,-47.015 ; 78.867,-47.028 79.057,-47.028 ; 78.905,-47.041 79.007,-47.041 ; 79.68,-46.444 79.718,-46.444 ; 80.023,-46.469 80.073,-46.469

## Other copper
Bottom Layer:
  text "Parsa Nami" at 80.01,-51.778 h1.52

## Silkscreen, mask and mechanical layers (free items; w line width, h text height)
Mechanical 1:
  circle w0.006: c90.944,-47.699 r0.003